# Allegro board PSU-A2-1-DEG.brd
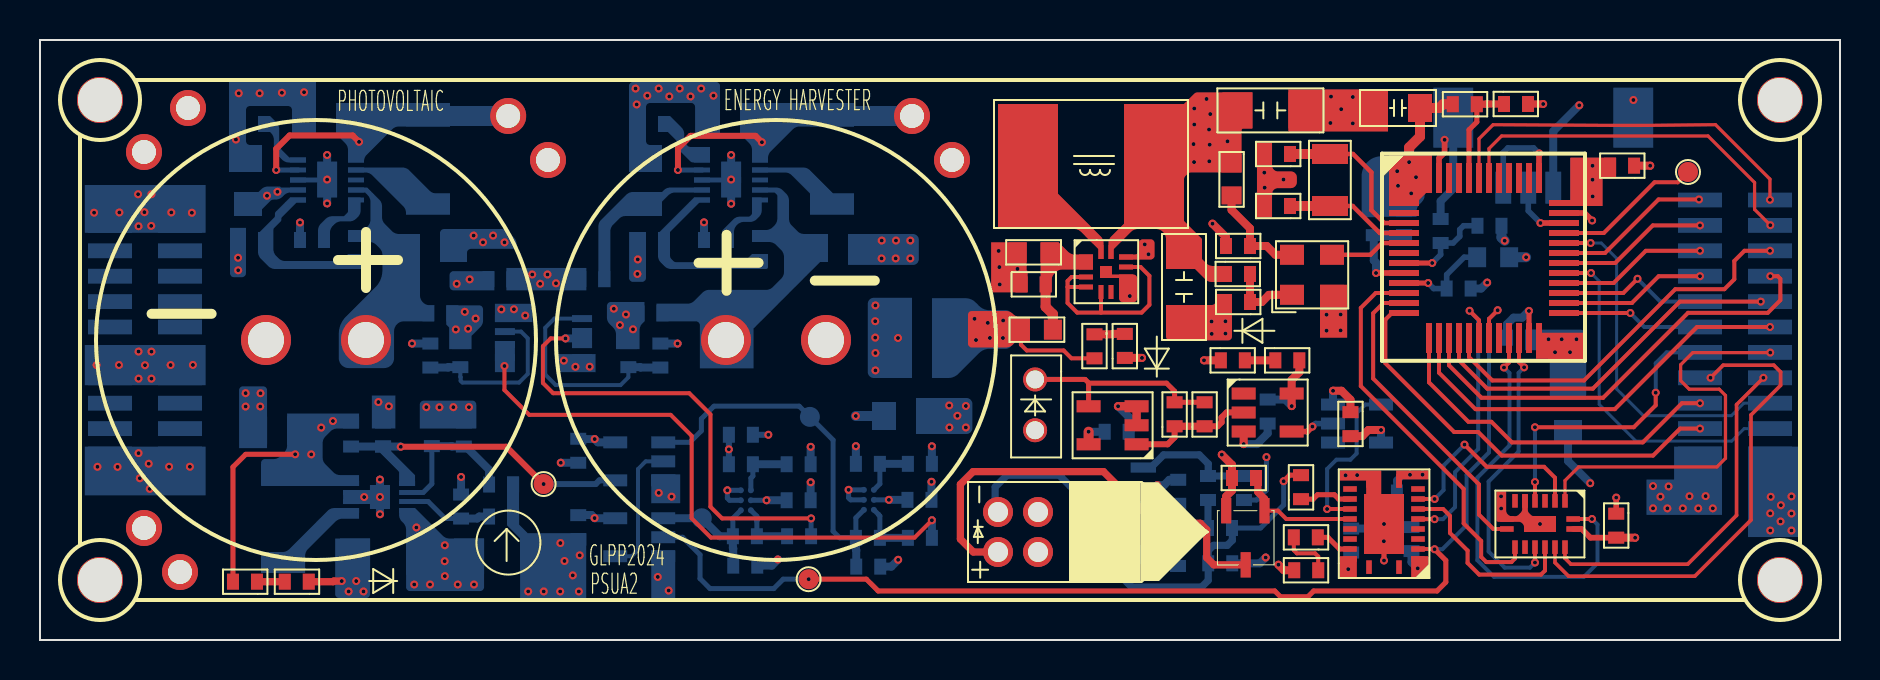
[diagram p0: board, top side]
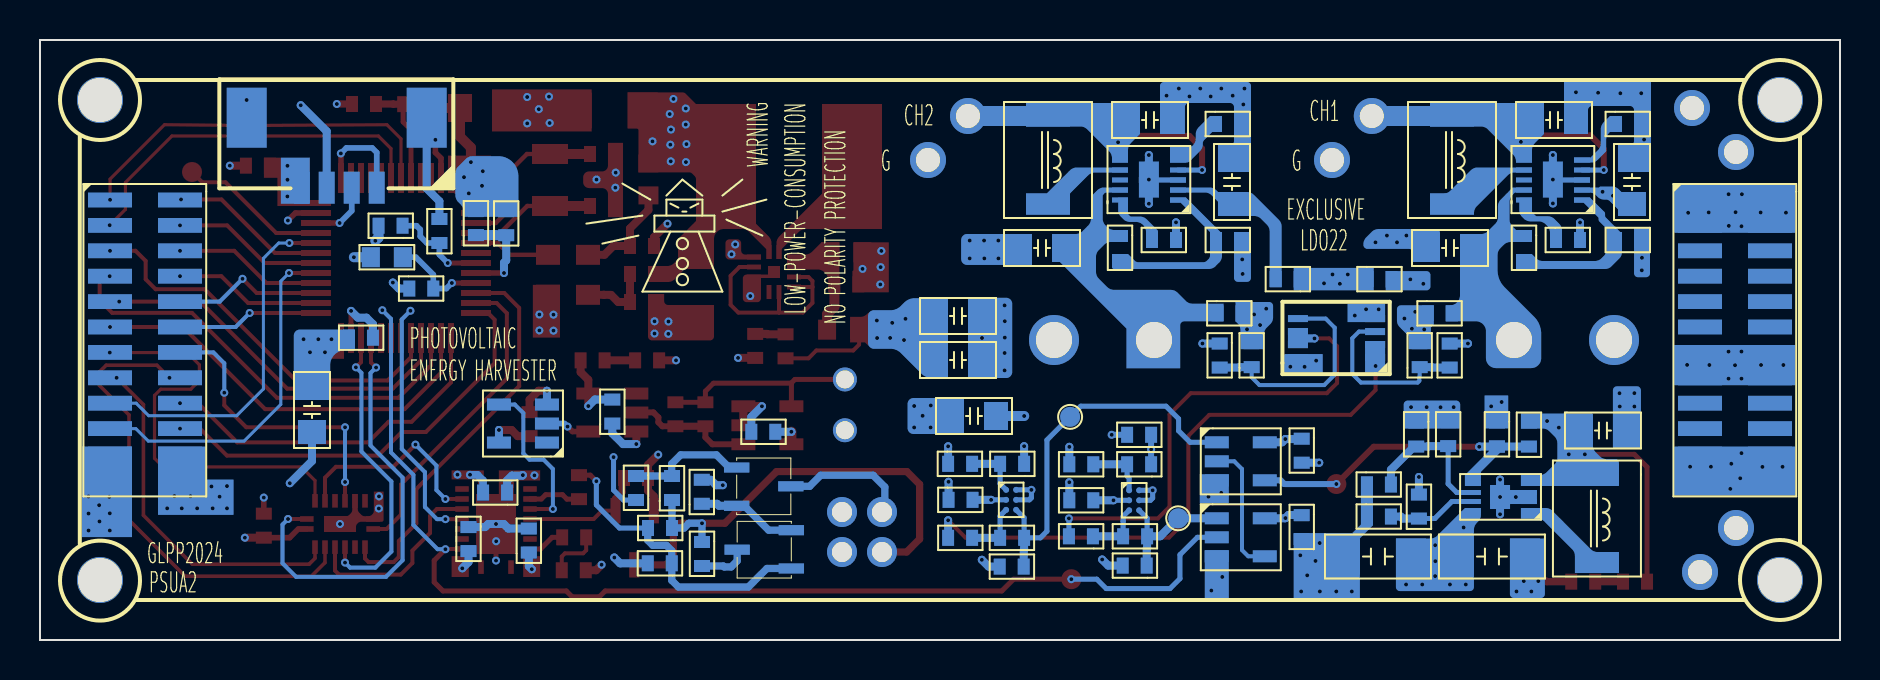
[diagram p1: board, bottom side, seen from below]

Outline 90 x 30 mm; copper layers: TOP, GND, VCC, BOTTOM. Coordinates in mm from the lower left corner of the outline.
Outline path: 0,30 90,30 90,0 0,0 0,30

## Design rules (mm)
constraint set DEFAULT: min track width 0.127
net group N478267: nets N478267 N478271
net group N485107: nets N485107 N485115
net group VCAP1: nets N478345 VCAP1
net group VCAP2: nets N485373 VCAP2
net group BOOST_EN: nets BOOST_EN N478287 N479043 N490401 N490405
net group CHG_FULL: nets CHG_FULL N490413 N490465 N490853 N490915 N491089 N491653 UV_SHDN
net group FIBER_TX_3V3: nets FIBER_TX_3V3 N527048 N527198 N527202 N527222

## Placement (name value [footprint] x y rotation side)
C1  10uF  [C0805]  69 26.6 180 top
C2  33uF  [C1206]  63.17 26.48 180 top
C3  12pF  [C0402]  62.5 24.3 180 top
C4  0.1uF  [C0402]  79.7 23.72 180 top
C5  12pF  [C0402]  62.5 21.7 180 top
C6  0.1uF  [C0402]  60.5 19.7 180 top
C7  10uF  [C0603]  50.48 19.38 180 top
C8  0.1uF  [C0402]  50.28 17.78 180 top
C9  33uF  [C1206]  57.2 16 90 top
C10  4.2V/1F  [SUC_THR_5D0_21D5]  13.8 15 180 top
C11  4.2V/1F  [SUC_THR_5D0_21D5]  36.8 15 0 top
C12  DNI  [C0402]  58.23 10.69 90 top
C13  0.1uF  [C0402]  65.52 11.39 270 top
C14  0.1uF  [C0402]  78.81 6.32 270 top
C15  10uF  [C0805]  35.6 26 180 bottom
C16  10uF  [C0805]  15.4 26 180 bottom
C17  0.1uF  [C0402]  66.69 20.24 90 bottom
C18  10uF  [C0805]  30.4 21.8 90 bottom
C19  10uF  [C0805]  10.4 21.8 90 bottom
C20  0.1uF  [C0402]  68.2 20.25 90 bottom
C21  0.1uF  [C0402]  70.03 19.85 90 bottom
C22  1uF  [C0402]  34.4 20 180 bottom
C23  1uF  [C0402]  14.2 20 180 bottom
C24  10uF  [C0805]  38.8 19.6 0 bottom
C25  10uF  [C0805]  18.4 19.6 0 bottom
C26  0.1uF  [C0402]  71.53 17.57 180 bottom
C27  10uF  [C0805]  45.2 16.2 180 bottom
C28  0.1uF  [C0402]  73.35 15.12 0 bottom
C29  10uF  [C0805]  45.2 14 180 bottom
C30  10uF  [C0805]  76.4 12.6 270 bottom
C31  0.1uF  [C0402]  61.38 10.82 90 bottom
C32  10uF  [C0805]  44.4 11.2 180 bottom
C33  10uF  [C0805]  12.95 10.47 180 bottom
C34  0.1uF  [C0402]  53.23 10.41 0 bottom
C35  33pF  [C0402]  21.19 10.87 270 bottom
C36  0.1uF  [C0402]  34.44 10.26 0 bottom
C37  0.1uF  [C0402]  26.91 10.06 270 bottom
C38  2.2uF  [C0402]  44.59 8.81 180 bottom
C39  2.2uF  [C0402]  38.53 8.79 180 bottom
C40  0.1uF  [C0402]  66.65 7.37 0 bottom
C41  0.1uF  [C0402]  44.57 7.01 180 bottom
C42  0.1uF  [C0402]  38.53 6.99 180 bottom
C43  0.1uF  [C0402]  26.91 6.24 270 bottom
C44  0.1uF  [C0402]  68.58 5.65 270 bottom
C45  0.1uF  [C0402]  65.56 4.37 90 bottom
C46  22uF  [C1206]  21.45 4.17 0 bottom
C47  22uF  [C1206]  19.05 4.17 180 bottom
D1  LED  [LED0402]  54.24 14.11 90 top
D2  GREEN LED  [LED0402]  59.04 13.98 0 top
D3  GREEN LED  [LED0402]  62.71 3.49 0 top
D4  GREEN LED  [LED0402]  13.44 2.91 180 top
J1  SIP-1x4  [SMD-1D25-4P-DEG0]  73.16 22.62 0 bottom
J2  CONN-24P  [SMD_CONN_2X12P_1D27]  83 22 270 bottom
J3  CONN-24P  [SMD_CONN_2X12P_1D27]  3.5 22 270 bottom
L1  33uH/1A  [IND_SMD_7D0X6D6]  55.7 23.8 180 top
L2  2.2uH  [L0603]  59.58 23.83 270 top
L3  2.2uH/500mA  [L0603]  49.05 15.52 0 top
L4  10uH/1A  [IND_SMD_4D4X4D2]  39.6 26.2 270 bottom
L5  10uH/1A  [IND_SMD_4D4X4D2]  19.4 26.2 270 bottom
L6  2.2uH  [L0603]  73.46 19.14 180 bottom
L7  4.7uH/1A  [IND_SMD_4D4X4D2]  12.15 8.27 270 bottom
LD1  LaserDiode  [AXIAL_2D0_4P]  47.9 4.4 90 top
NOREF  -  [unnamed]  3 27 0 top
NOREF#2  -  [unnamed]  3 3 0 top
NOREF#3  -  [#2]  0 0 90 top
NOREF#4  -  [unnamed]  87 3 0 top
NOREF#5  -  [#2]  0 30 0 top
NOREF#6  -  [unnamed]  87 27 0 top
PD1  Photodiode  [PD-THR-2P]  49.76 13.03 270 top
Q1  Si2301BDS-HXY  [SOT23-3]  61.7 6.9 180 top
Q2  2SC1815  [SOT23-3]  55.6 9.1 270 bottom
Q3  2SC1815  [SOT23-3]  52 3.1 90 bottom
R1  DNI  [R0402]  71.84 26.79 180 top
R2  0R  [R0402]  73.2 26.8 0 top
R3  DNP  [R0402]  59.3 18.3 0 top
R4  0R  [R0402]  60.5 16.9 180 top
R5  2K  [R0402]  52.72 15.29 270 top
R6  20K  [R0402]  61.77 13.98 0 top
R7  DNI  [R0402]  56.73 10.69 90 top
R8  10K  [R0402]  59.6 8.1 0 top
R9  5.1K  [R0402]  63.05 7.04 90 top
R10  20K  [R0402]  63.89 5.13 180 top
R11  DNI  [R0402]  10.85 2.91 180 top
R12  200K  [R0402]  31.2 25.8 180 bottom
R13  200K  [R0402]  11.2 25.8 180 bottom
R14  10K  [R0402]  71.87 20.71 0 bottom
R15  1M  [R0402]  31.2 20 180 bottom
R16  1M  [R0402]  11.2 20 180 bottom
R17  2.26M  [R0402]  36 20.2 270 bottom
R18  2.26M  [R0402]  15.8 20.2 270 bottom
R19  0R  [R0402]  27.02 18.04 0 bottom
R20  DNP  [R0402]  23.62 18.04 180 bottom
R21  0R  [R0402]  31.12 16.34 180 bottom
R22  0R  [R0402]  20.61 16.34 180 bottom
R23  1M  [R0402]  31.02 14.82 270 bottom
R24  1M  [R0402]  29.42 13.64 90 bottom
R25  1M  [R0402]  21.02 13.64 90 bottom
R26  1M  [R0402]  19.52 14.82 270 bottom
R27  1M  [R0402]  19.59 9.69 90 bottom
R28  100K  [R0402]  17.15 10.87 270 bottom
R29  DNI  [R0402]  15.55 9.67 90 bottom
R30  3.3K  [R0402]  40.79 8.81 0 bottom
R31  3.3K  [R0402]  34.44 8.79 0 bottom
R32  562K  [R0402]  23.65 7.77 180 bottom
R33  560  [R0402]  60.2 8.2 270 bottom
R34  510  [R0402]  58.4 7 90 bottom
R35  51  [R0402]  56.91 6.81 90 bottom
R36  DNI  [R0402]  21.05 6.07 90 bottom
R37  100K  [R0402]  23.65 6.17 180 bottom
R38  510  [R0402]  58.4 5.6 0 bottom
R39  3.01K  [R0402]  37.35 5.19 0 bottom
R40  4.99K  [R0402]  35.84 5.19 180 bottom
R41  200K  [R0402]  43.39 5.11 0 bottom
R42  998K?  [R0402]  41.99 5.11 180 bottom
R43  51  [R0402]  56.9 4.9 270 bottom
R44  510  [R0402]  58.41 3.84 0 bottom
R45  22.9K?  [R0402]  34.66 3.72 0 bottom
R46  378K?  [R0402]  40.81 3.67 0 bottom
TP1  T POINT R  [TP_THR_1D8_1D2]  7.4 26.6 0 top
TP2  T POINT R  [TP_THR_1D8_1D2]  5.2 24.4 0 top
TP3  T POINT S  [TP_SMD_1D0_NP]  82.4 23.4 0 top
TP4  T POINT S  [TP_SMD_1D0_NP]  25.18 7.8 0 top
TP5  T POINT R  [TP_THR_1D8_1D2]  5.2 5.6 0 top
TP6  T POINT R  [TP_THR_1D8_1D2]  7 3.4 0 top
TP7  T POINT S  [TP_SMD_1D0_NP]  38.43 3.04 0 top
TP8  Solar Cell V+  [TP_THR_1D8_1D2]  23.41 26.2 180 bottom
TP9  Solar Cell V+  [TP_THR_1D8_1D2]  43.6 26.2 180 bottom
TP10  Solar Cell V-  [TP_THR_1D8_1D2]  45.6 24 180 bottom
TP11  Solar Cell V-  [TP_THR_1D8_1D2]  25.4 24 180 bottom
TP12  T POINT S  [TP_SMD_1D0_NP]  38.49 11.16 180 bottom
TP13  T POINT S  [TP_SMD_1D0_NP]  33.09 6.09 180 bottom
U1  STM32L051C8T6  [LQFP-48]  72.2 19.1 270 top
U2  LTC3336EV#TRPBF  [LQFN-12-2D0X2D0MM]  53.3 18.4 0 top
U3  SN74AHC1G14DBVR  [SOT-23-5]  60.18 12.32 0 top
U4  TLV365DBVR  [SOT-23-5]  54.83 9.79 180 top
U5  TXS0108ERGYR  [VQFN-20]  67.2 5.8 90 top
U6  TMUX1309BQBR  [WQFN-16-3D5X2D5MM]  75 5.8 180 top
U7  LTC3105EDD#PBF  [DFN-10]  36 22 90 bottom
U8  LTC3105EDD#PBF  [DFN-10]  15.8 22 90 bottom
U9  ADA4051-2ARMZ  [MSOP-8]  26.86 14.12 90 bottom
U10  SN74AHC1G14DBVR  [SOT-23-5]  64.65 9.87 0 bottom
U11  SN74AUP1G08DBVR  [SOT-23-5]  31.16 9.88 180 bottom
U12  LTC3539EDCB#PBF  [DFN-8]  18.35 6.47 90 bottom
U13  ADCMP380-1ACBZ-RL7  [WLCSP-6]  41.69 7.51 180 bottom
U14  ADCMP380-1ACBZ-RL7  [WLCSP-6]  35.54 7.49 180 bottom
U15  SN74LVC1G32DBVR  [SOT-23-5]  31.16 6.09 180 bottom
Y1  32.768KHz  [SMD3215-2P]  64.5 24.3 270 top
Y2  32.0MHz_X1G0041710040  [SMD2520-4P]  63.6 18.3 0 top

## Library data of the parts
C1 C10 C11 C15 C16 C18 C19 C21 C24-C27 C29 C30 C32 C33 = CAP NP: signal model: DEFAULT_CAPACITOR_1e+07pF_2_1
C2-C9 C12-C14 C17 C20 C28 C31 C34 C37 C40 C43-C45 = CAP NP
C22 C23 = CAP NP: signal model: DEFAULT_CAPACITOR_1e+06pF_2_1
C35 = CAP NP: signal model: DEFAULT_CAPACITOR_33.000000pF_2_1
C36 C41 C42 = CAP NP: signal model: DEFAULT_CAPACITOR_100000pF_2_1
C38 C39 = CAP NP: signal model: DEFAULT_CAPACITOR_2.2e+06pF_2_1
C46 C47 = CAP NP: signal model: DEFAULT_CAPACITOR_2.2e+07pF_2_1
D1-D4 = LED
J1 = SIP-1x4
J2 J3 = CONN-24P
L1-L3 = INDUCTOR
L4 L5 = INDUCTOR: signal model: DEFAULT_INDUCTOR_10000nH_2_1
L6 L7 = INDUCTOR: signal model: DEFAULT_INDUCTOR_4700nH_2_1
LD1 = LaserDiode
PD1 = Photodiode
Q1 = FH3415A
Q2 Q3 = 2SC1815
R1 R2 R14-R16 R23-R27 = R: signal model: DEFAULT_RESISTOR_0.001OHM_2_1
R3-R7 R10 R11 R19-R22 = R
R8 R28 R29 R36 R37 R45 R46 = R: signal model: DEFAULT_RESISTOR_10000OHM_2_1
R9 R33 R34 R38 R44 = R: signal model: DEFAULT_RESISTOR_510.000000OHM_2_1
R12 R13 = R: signal model: DEFAULT_RESISTOR_200000OHM_2_1
R17 R18 = R: signal model: DEFAULT_RESISTOR_0.00226OHM_2_1
R30 R31 = R: signal model: DEFAULT_RESISTOR_3300OHM_2_1
R32 = R: signal model: DEFAULT_RESISTOR_562000OHM_2_1
R35 R43 = R: signal model: DEFAULT_RESISTOR_40.000000OHM_2_1
R39 R41 = R: signal model: DEFAULT_RESISTOR_36000OHM_2_1
R40 R42 = R: signal model: DEFAULT_RESISTOR_147000OHM_2_1
TP1 TP2 TP5 TP6 = T POINT R
TP3 TP4 TP7 TP12 TP13 = T POINT S
TP8-TP11 = T POINT A
U1 = STM32L051C8T6
U2 = LTC3336
U3 U10 = SN74AHC1G14DBVR
U4 = TLV365DBVR
U5 = TXS0108ERGYR
U6 = TMUX1309
U7 U8 = LTC3105EDD#PBF
U9 = ADA4051-2ARMZ
U11 = SN74AUP1G08
U12 = LTC3539EDCB#PBF
U13 U14 = ADCMP380-1ACBZ-RL7
U15 = SN74LVC1G32DBVR
Y1 = CRYSTAL
Y2 = OSCILLATOR

## Footprints (pads in the part's own frame, mm; a bottom-side part is the same pattern mirrored in y, then rotated)
AXIAL_2D0_4P
  round 1.5 hole 1: 1(0,0) 2(2,0) 3(0,-2) 4(2,-2)
C0402
  rect 0.6x0.8 smd: 1(0,0) 2(1.2,0)
C0603
  rect 0.9x1 smd: 1(0,0) 2(1.6,0)
C0805
  rect 1.2x1.4 smd: 1(0,0) 2(2.2,0)
C1206
  rect 1.5x1.8 smd: 1(0,0) 2(3.3,0)
DFN-8
  rect 0.25x0.8 smd: 1(0,-2.8) 2(0.45,-2.8) 3(0.9,-2.8) 4(1.35,-2.8) 5(1.35,0) 6(0.9,0) 7(0.45,0) 8(0,0)
  rect 1.2x1 smd: 9(0.676,-1.355)
DFN-10
  rect 0.25x0.8 smd: 1(0,-2.9) 2(0.5,-2.9) 3(1,-2.9) 4(1.5,-2.9) 5(2,-2.9) 6(2,0) 7(1.5,0) 8(1,0) 9(0.5,0) 10(0,0)
  rect 1.8x1 smd: 11(1.022,-1.444)
IND_SMD_4D4X4D2
  rect 1.05x2.2 smd: 1(0,0) 2(4.4,0)
IND_SMD_7D0X6D6
  rect 3x6 smd: 1(0,0) 2(6.3,0)
L0603
  rect 0.9x1 smd: 1(0,0) 2(1.6,0)
LED0402
  rect 0.6x0.8 smd: 1(0,0) 2(1.2,0)
LQFN-12-2D0X2D0MM
  rect 0.7x0.25 smd: 1(-1,0.75) 2(-1,0.25) 3(-1,-0.25) 4(-1,-0.75) 7(1,-0.75) 8(1,-0.25) 9(1,0.25) 10(1,0.75)
  rect 0.25x0.7 smd: 5(-0.25,-1) 6(0.25,-1) 11(0.25,1) 12(-0.25,1)
  rect 0.6x0.6 smd: 13(0,0)
LQFP-48
  rect 0.3x1.5 smd: 1(-2.75,-4) 2(-2.25,-4) 3(-1.75,-4) 4(-1.25,-4) 5(-0.75,-4) 6(-0.25,-4) 7(0.25,-4) 8(0.75,-4) 9(1.25,-4) 10(1.75,-4) 11(2.25,-4) 12(2.75,-4) 25(2.75,4) 26(2.25,4) 27(1.75,4) 28(1.25,4) 29(0.75,4) 30(0.25,4) 31(-0.25,4) 32(-0.75,4) 33(-1.25,4) 34(-1.75,4) 35(-2.25,4) 36(-2.75,4)
  rect 1.5x0.3 smd: 13(4,-2.75) 14(4,-2.25) 15(4,-1.75) 16(4,-1.25) 17(4,-0.75) 18(4,-0.25) 19(4,0.25) 20(4,0.75) 21(4,1.25) 22(4,1.75) 23(4,2.25) 24(4,2.75) 37(-4,2.75) 38(-4,2.25) 39(-4,1.75) 40(-4,1.25) 41(-4,0.75) 42(-4,0.25) 43(-4,-0.25) 44(-4,-0.75) 45(-4,-1.25) 46(-4,-1.75) 47(-4,-2.25) 48(-4,-2.75)
MSOP-8
  rect 0.35x1 smd: 1(-0.001,-3.615) 2(0.649,-3.615) 3(1.299,-3.615) 4(1.949,-3.615) 5(1.949,0.241) 6(1.299,0.241) 7(0.649,0.241) 8(-0.001,0.241)
PD-THR-2P
  round 1.2 hole 0.9: 1(0,0) 2(2.54,0)
R0402
  rect 0.6x0.8 smd: 1(0,0) 2(1.2,0)
SMD2520-4P
  rect 1.2x1 smd: 1(-1,-1.04) 2(1,-1.04) 3(1,0.96) 4(-1,0.96)
SMD3215-2P
  rect 1x1.8 smd: 1(0,0) 2(2.6,0)
SMD-1D25-4P-DEG0
  rect 0.8x1.6 smd: 1(0,0) 2(1.25,0) 3(2.5,0) 4(3.75,0)
  rect 2x3 smd: 5(6.5,-3.5) 6(-2.5,-3.5)
SMD_CONN_2X12P_1D27
  rect 0.74x2.2 smd: 1(0,-3.5) 2(1.27,-3.5) 3(2.54,-3.5) 4(3.81,-3.5) 5(5.08,-3.5) 6(6.35,-3.5) 7(7.62,-3.5) 8(8.89,-3.5) 9(10.16,-3.5) 10(11.43,-3.5) 11(12.7,-3.5) 12(13.97,-3.5) 13(13.97,0) 14(12.7,0) 15(11.43,0) 16(10.16,0) 17(8.89,0) 18(7.62,0) 19(6.35,0) 20(5.08,0) 21(3.81,0) 22(2.54,0) 23(1.27,0) 24(0,0)
SOT23-3
  rect 0.51x1.27 smd: 1(0.476,0.434) 2(2.391,0.434) 3(1.415,3.142)
SOT-23-5
  rect 1.2x0.6 smd: 1(0,0) 2(0,-0.95) 3(0,-1.9) 4(2.4,-1.9) 5(2.4,0)
SUC_THR_5D0_21D5
  round 2.5 hole 1.8: 1(-2.5,0) 2(2.5,0)
TP_SMD_1D0_NP
  round 1 smd: 1(0,0)
TP_THR_1D8_1D2
  round 1.8 hole 1.2: 1(0,0)
unnamed
  round 2.3 hole 2.2 unplated: (0,0)
VQFN-20
  rect 0.68x0.28 smd: 1(-2.157,-0.75) 10(2.158,-0.75) 11(2.158,0.75) 20(-2.157,0.75)
  rect 0.28x0.68 smd: 2(-1.75,-1.7) 3(-1.25,-1.7) 4(-0.75,-1.7) 5(-0.25,-1.7) 6(0.25,-1.7) 7(0.75,-1.7) 8(1.25,-1.7) 9(1.75,-1.7) 12(1.75,1.7) 13(1.25,1.7) 14(0.75,1.7) 15(0.25,1.7) 16(-0.25,1.7) 17(-0.75,1.7) 18(-1.25,1.7) 19(-1.75,1.7)
  rect 3x2 smd: EPAD(0,0)
WLCSP-6
  round 0.3 smd: A1(0,0) A2(0.5,0) B1(0,-0.5) B2(0.5,-0.5) C1(0,-1) C2(0.5,-1)
WQFN-16-3D5X2D5MM
  rect 0.68x0.28 smd: 1(-1.658,-0.25) 8(1.657,-0.25) 9(1.657,0.25) 16(-1.658,0.25)
  rect 0.28x0.68 smd: 2(-1.25,-1.158) 3(-0.75,-1.158) 4(-0.25,-1.158) 5(0.25,-1.158) 6(0.75,-1.158) 7(1.25,-1.158) 10(1.25,1.157) 11(0.75,1.157) 12(0.25,1.157) 13(-0.25,1.157) 14(-0.75,1.157) 15(-1.25,1.157)
  rect 1.6x0.8 smd: EPAD(0,0)

## Nets
GND: C1.2 C2.1 C3.2 C4.1 C5.2 C6.2 C7.2 C8.2 C9.1 C10.2 C11.2 C13.1 C14.1 C15.2 C16.2 C17.1 C18.2 C19.2 C20.1 C21.2 C22.2 C23.2 C24.2 C25.2 C26.1 C27.2 C28.1 C29.2 C30.2 C31.1 C32.1 C33.2 C34.2 C36.2 C37.2 C38.1 C39.1 C40.1 C41.1 C42.1 C43.2 C44.1 C45.2 C46.2 C47.2 D1.1(CATHODE) D2.1(CATHODE) D3.1(CATHODE) D4.1(CATHODE) J1.3 J1.5 J1.6 J2.11 J2.12 J3.7 J3.8 J3.17 J3.18 PD1.2 R2.2 R4.2 R12.2 R13.2 R15.2 R16.2 R23.1 R26.1 R28.1 R32.1 R33.2 R35.2 R37.1 R44.2 TP1.1(TP) TP6.1(TP) TP10.1(TP) TP11.1(TP) U1.8(VSSA) U1.23 U1.35 U1.47 U2.7 U2.8 U2.10 U2.13 U3.3 U4.2 U4.3 U5.11 U5.EPAD U6.6 U6.8 U6.EPAD U7.3 U7.11 U8.3 U8.11 U9.4(V-) U10.3 U11.3 U12.2 U12.3 U12.9 U13.A2 U13.B2 U14.A2 U14.B2 U15.3 Y2.2
P1V8: C1.1 C2.2 C4.2 C9.2 C14.2 C17.2 C20.2 C28.2 C30.1 C40.2 C44.2 J1.4 L1.1 L2.1 L6.1 R1.2 R3.1 R14.2 U1.1 U1.24 U1.36 U1.48 U2.11(VOUT) U5.2 U5.10 U6.16(VDD)
P3V3: C13.2 C27.1 C29.1 C31.2 C34.1 C35.1 C45.1 C46.1 C47.1 J2.13 J2.14 J3.1 J3.2 J3.11 J3.12 J3.13 J3.14 J3.23 J3.24 L3.1 Q1.2(S) R5.2 R6.2 R8.1 R27.2 TP2.1(TP) TP5.1(TP) U3.5 U4.5 U5.19(VCCB) U10.5 U12.8(VOUT)
ALL_SHUTDOWN: J3.22
BOOST_EN: R28.2 R29.1 TP4.1(TP) U11.4(Y) U12.5
CHG_FULL: R40.2 R45.1 TP13.1(TP) U14.C2 U15.1
FIBER_RX: U5.7 U6.13
FIBER_RX_3V3: U5.14 U10.4(Y)
FIBER_TX: U5.8 U6.3
FIBER_TX_3V3: R9.1 U5.13
I2C1_SCL: J2.2 U1.42
I2C1_SDA: J2.1 U1.43
IAM_ALIVE: TP7.1(TP) U1.19 U5.3 U15.2
IR_UART_RX: J2.17 U6.14
IR_UART_TX: J2.18 U6.5
LDO22: C32.2 C36.1 C37.1 C41.2 C42.2 C43.1 R19.1 R20.1 R30.1 R31.1 R45.2 R46.2 U9.8 U11.5 U13.B1 U14.B1 U15.5
LDO22-1: C19.1 R20.2 U8.2
LDO22-2: C18.1 R19.2 U7.2
LPUART1_RX: U1.22 U6.12
LPUART1_TX: U1.21 U6.1
OV_UART_RX: J2.8 U6.15
OV_UART_TX: J2.7 U6.2
PA8: J2.10 U1.29
PA11: J2.9 U1.32
RESERVED1: U1.41
RESERVED2: U1.40
ROUTE_A0: U1.10 U6.10
ROUTE_A1: U1.11 U6.9
SPI1_MISO: J2.5 U1.16
SPI1_MOSI: J2.3 U1.17
SPI1_NSS: J2.6 U1.14
SPI1_SCK: J2.4 U1.15
SPI2_MISO: J2.20 U1.27
SPI2_MOSI: J2.22 U1.28
SPI2_NSS: J2.19 U1.25
SPI2_SCK: J2.21 U1.26
SYS_SWCLK: J1.1 U1.37
SYS_SWDIO: J1.2 U1.34
TX_EN: U1.18 U5.6
TX_PWR_EN: Q1.1 R8.2 U5.15
UN-USED-1: J3.3
UN-USED-2: J3.4
UN-USED-3: J3.5
UN-USED-4: J3.6
UN-USED-5: J3.9
UN-USED-6: J3.10
UN-USED-7: J3.15
UN-USED-8: J3.16
UN-USED-9: J3.19
UN-USED-10: J3.20
UN-USED-11: J3.21
USART1_RX: J2.24 U1.31
USART1_TX: J2.23 U1.30
USART2_RX: J2.16 U1.13
USART2_TX: J2.15 U1.12
UV_SHDN: R42.2 R46.1 TP12.1(TP) U11.1 U13.C2
VCAP: C33.1 L7.1 R11.2 R21.2 R22.1 R24.2 R25.2 R29.2 R36.2 U12.4
VCAP1: C10.1 C25.1 R18.1 R22.2 U8.9(VOUT)
VCAP2: C11.1 C24.1 R17.1 R21.1 U7.9(VOUT)
N478267: C16.1 L5.1 TP8.1(TP) U8.4 U8.6
N478271: L5.2 U8.7
N478287: L7.2 U12.1
N478345: R16.1 R18.2 U8.1
N478365: C35.2 R27.1 R32.2 U12.6
N478369: R13.1 U8.5
N478385: C23.1 U8.10
N479043: R36.1 R37.2 U12.7
N485107: C15.1 L4.1 TP9.1(TP) U7.4 U7.6
N485115: L4.2 U7.7
N485373: R15.1 R17.2 U7.1
N485445: R12.1 U7.5
N485483: C22.1 U7.10
N490401: R23.2 R24.1 U9.5
N490405: R25.1 R26.2 U9.3
N490413: C38.2 R30.2 U13.A1(VCC)
N490465: R41.2 U9.1 U9.2
N490853: R41.1 R42.1 U13.C1
N490915: R39.2 U9.6 U9.7
N490953: U11.2 U15.4(Y)
N491089: C39.2 R31.2 U14.A1(VCC)
N491611: C7.1 C8.1 L3.2 U2.1 U2.2
N491653: R39.1 R40.1 U14.C1
N492211: L1.2 U2.12
N492453: U2.3 U2.4 U2.5 U2.9
N504730: C3.1 U1.3 Y1.1
N504882: C5.1 U1.4 Y1.2
N512213: U1.5 Y2.3
N512221: R3.2 R4.1 Y2.1
N512229: C6.1 L2.2 Y2.4(VDD)
N517140: C26.2 L6.2 U1.9
N518111: C21.1 R14.1 U1.7
N527048: LD1.1 Q1.3 R34.1 R38.1 R43.1
N527184: LD1.2 Q2.3
N527198: Q3.1 R9.2 R38.2 R44.1
N527202: Q3.3 R43.2
N527222: Q2.1 R33.1 R34.2
N527434: Q2.2(E) Q3.2(E) R35.1
N541574: D3.2 R10.2
N546758: C12.2 PD1.1 R7.2 U4.4
N546765: C12.1 R7.1 U3.2 U4.1(VOUT)
N549679: U3.4(Y) U10.2
N554827: D2.2 R6.1
N555295: D4.2 R11.1
N563900: R10.1 U5.18
N602776: R1.1 R2.1 U1.44
N742936: D1.2 R5.1
N756514: TP3.1(TP) U1.33

Pads without a net: LD1 3 4; U1 2 6 20 38 39 45 46; U2 6; U3 1; U5 1 4 5 9 12 16 17 20; U6 4 7 11; U7 8; U8 8; U10 1

## Via types
v1: diameter 0.4, hole 0.2, TOP to BOTTOM, 318 vias

## Routing (per net, layer and track width the routed paths; a pad name or vN(x,y) marks a point on that pad's centre or on a via; arc(x,y) is an arc through that point)
GND: length 73.6
  TOP w0.127: 67.2,4.95 v1(67.19,4.94)
  TOP w0.25: v1(67.2,3.97) v1(67.2,5.8) ; U1.23 74.45,16.45 v1(74.45,16.45)
  TOP w0.28: U1.47 69.95,24.09 70.23,24.37 v1(70.23,25.01) ; v1(77.61,20.98) 77.23,21.35 U1.35 ; U1.8 v1(66.8,18.35) ; C14.1 v1(78.81,7.12)
  TOP w0.36: v1(15.09,2.95) 14.69,2.95 14.66,2.91 D4.1 ; R2.2 v1(75.16,26.8)
  TOP w0.4: D1.1 v1(55.1,14.11) ; v1(61.92,3.76) 62.2,3.49 D3.1 ; D2.1 v1(58.2,13.98) ; C4.1 v1(80.51,23.72) ; C6.2 59.3,20.14 v1(58.62,20.81) ; v1(64.65,12.46) 65.08,12.46 65.52,12.02 C13.1 ; U3.3 v1(60.18,9.8)
  TOP w0.42: v1(53.9,11.69) U4.3 U4.2
  BOTTOM w0.25: R33.2 60.83,7 61.32,7.5 v1(61.32,9.14) ; U13.A2 v1(40.43,7.51) 40.43,7.12 40.45,7.09 40.45,7.09 40.53,7.01 U13.B2 ; U14.A2 v1(34.37,7.49) 34.37,7.1 34.48,6.99 U14.B2
  BOTTOM w0.3: C36.2 v1(36.42,10.26)
  BOTTOM w0.4: v1(14.36,21.83) v1(14.36,23.02) v1(14.36,24.25) ; v1(34.56,24.25) v1(34.56,23.02) v1(34.56,21.81) ; v1(74.45,16.45) 74.11,16.12 73.68,16.12 73.35,15.79 C28.1 ; v1(76.96,26.74) 75.66,25.44 J1.3 ; v1(66.8,18.35) 66.8,18.87 66.69,18.98 C17.1 ; C40.1 66.65,7.98 66.4,8.22 65.88,8.22 v1(65.86,8.24) ; C22.2 v1(33.2,20.88) ; R44.2 61,3.84 v1(61.28,4.12) ; v1(55.86,7.74) 56.2,7.74 56.47,8.01 R35.2 ; C31.1 61.38,10.33 60.85,9.8 v1(60.18,9.8) ; U10.3 v1(64.65,12.46) ; J1.6 70.66,22.57 70.03,21.94 C21.2 ; C38.1 v1(44.59,9.68) ; C30.2 76.4,8.95 v1(77.51,7.84) ; C42.1 v1(38.53,7.89) ; v1(17,8.02) v1(17,7.15) v1(17,6.29) ; R23.1 v1(31.88,14.82) ; C26.1 72.06,17.57 v1(72.36,17.87) ; C23.2 v1(13,20.88) ; C41.1 v1(44.57,7.91) ; C34.2 54.44,11.15 v1(53.9,11.69) ; C39.1 v1(38.53,9.66) ; R26.1 v1(18.6,14.82) ; C45.2 66.58,5.57 66.81,5.8 v1(67.2,5.8) 67.59,5.8 67.74,5.65 C44.1 ; C37.2 v1(26.04,8.86)
  BOTTOM w0.5: C17.1 67.28,20.24 67.29,20.25 C20.1
  vias: v1(2.83,13.75) v1(3.95,13.75) v1(4.93,14.42) v1(4.93,13.07) v1(5.25,13.74) v1(5.57,14.42) v1(5.57,13.07) v1(6.53,13.75) v1(7.64,13.75) v1(9.8,25.02) v1(9.94,27.34) v1(9.9,19.11) v1(9.91,18.48) v1(10.28,12.34) v1(10.28,11.67) v1(10.98,27.34) v1(11.03,12.34) v1(11.01,11.67) v1(12.1,27.36) v1(13.2,27.39) v1(15.43,2.43) v1(15.81,2.95) v1(16.21,7.15) v1(16.18,2.43) v1(16.92,11.9) v1(17.44,11.68) v1(21.68,20.22) v1(22.15,19.88) v1(22.65,20.22) v1(23.07,16.53) v1(23.23,19.88) v1(23.7,16.54) v1(24.26,16.22) v1(24.41,2.43) v1(25.19,2.43) v1(26.02,4.85) v1(26.01,2.43) v1(26.23,3.95) v1(26.64,3.23) v1(26.94,2.43) v1(26.99,4.23) v1(29.78,27.57) v1(29.84,26.78) v1(29.89,19.03) v1(29.87,18.3) v1(30.36,27.22) v1(30.93,27.57) v1(30.94,7.36) v1(30.89,3.15) v1(31.43,2.47) v1(31.46,27.18) v1(31.58,7.17) v1(31.99,27.57) v1(32.53,27.18) v1(33.06,27.57) v1(33.67,27.22) v1(41.77,16.73) v1(41.76,15.94) v1(41.76,15.12) v1(41.77,14.35) v1(41.77,13.48) v1(42.09,19.97) v1(42.08,19.08) v1(42.8,19.97) v1(42.78,19.08) v1(42.9,15.1) v1(43.52,19.97) v1(43.52,19.08) v1(45.46,11.73) v1(45.47,10.63) v1(45.87,11.21) v1(46.29,11.7) v1(46.29,10.63) v1(47.93,19.45) v1(47.97,18.64) v1(47.99,17.78) v1(48.87,18.56) v1(54.49,17.2) v1(55.24,19.78) v1(55.43,19.29) v1(58.58,15.92) v1(58.58,15.31) v1(59.27,15.94) v1(59.27,15.32) v1(61.21,23.37) v1(61.23,22.62) v1(62.17,23.02) v1(64.33,16.27) v1(64.33,15.47) v1(64.55,27.17) v1(64.52,25.85) v1(65.03,16.27) v1(65.03,15.48) v1(65.06,26.54) v1(65.28,8.23) v1(65.64,27.15) v1(65.64,25.83) v1(73.05,7.18) v1(73.06,6.57) v1(75,5.8) v1(79.67,27) v1(86.54,7.16) v1(86.51,6.33) v1(86.51,5.47) v1(87.04,6.74) v1(87.03,5.93) v1(87.57,7.18) v1(87.57,6.32) v1(87.57,5.47)
P1V8: length 32.7
  TOP w0.127: C9.2 57.35,19.3
  TOP w0.28: U6.16 77.08,5.55 77.52,5.11 C14.2
  TOP w0.4: C14.2 v1(79.76,5.11)
  TOP w0.5: v1(68.45,23.89) 68.45,24.62 69,25.17 C1.1 69.96,26.6 70.15,26.79 R1.2
  VCC w0.127: v1(58.52,26.3) 57.99,25.77 v1(57.71,25.77) 57.71,26.16 v1(57.71,26.58) ; v1(58.52,26.3) 58.79,26.02 58.79,25.86 v1(58.45,25.52) ; v1(58.52,26.3) 58.33,26.48 v1(58.33,27.05) ; v1(58.46,23.93) 58.46,24.35 58.48,24.37 v1(58.48,24.76) ; v1(57.7,23.89) 57.7,24.38 57.68,24.4 v1(57.68,24.8) 57.98,24.49 58.21,24.49 v1(58.48,24.76) ; v1(58.45,25.52) 58.76,25.21 59.1,25.21 v1(59.38,24.93) ; v1(58.45,25.52) 58.18,25.25 58.18,25.07 v1(58.48,24.76) ; v1(76.5,14.39) 76.82,14.71 v1(76.82,15.04) v1(76.08,15.04) v1(75.43,15.04) 75.43,14.71 v1(75.75,14.39) ; v1(68.8,23.14) 68.8,23.55 v1(68.45,23.89) 68,23.44 v1(67.86,23.44) 68.18,23.12 68.18,22.99 v1(67.9,22.71) 68.28,22.33 v1(68.56,22.33) ; v1(77.63,22.18) 77.63,22.62 77.63,22.62 v1(77.63,23.01) v1(77.63,23.71) ; v1(69.13,8.27) 69.12,8.26 v1(68.5,8.26)
  BOTTOM w0.38: v1(68.56,22.33) 68.28,22.05 68.28,22.02 68.2,21.94 C20.2 ; C40.2 67.85,7.98 68.13,8.26 v1(68.5,8.26) ; v1(67.9,22.71) 67.07,22.71 66.69,22.33 C17.2
  BOTTOM w0.4: v1(68.89,3.58) 68.58,3.89 C44.2
  BOTTOM w0.5: L6.1 v1(74.31,19.14) ; v1(73.23,19.96) 73.07,20.12 73.07,20.71
P3V3: length 55
  TOP w0.2: L3.1 49.05,14.77 49.34,14.48 51.18,14.48 51.57,14.09 R5.2
  TOP w0.4: 59.31,6.47 59.31,7.18 59.6,7.47 R8.1 59.6,8.76 v1(59.09,9.27) ; C13.2 66.11,10.19 66.42,10.5 v1(67.05,10.5) ; v1(62.58,11.7) U3.5 62.58,13.01 62.97,13.39 R6.2
  TOP w0.5: U4.5 v1(52.43,10.41)
  VCC w0.127: v1(48.15,15.1) 51.13,15.1 52.43,13.8 v1(52.43,10.41) 57.95,10.41 ; v1(48.15,15.1) 48.15,15.49 48.16,15.5 v1(48.16,15.97) 48.04,15.86 v1(47.39,15.86) 47.19,16.06 v1(46.73,16.06) ; v1(48.15,15.1) 48.14,15.1 v1(47.49,15.1) 47.39,15 v1(46.8,15) ; 57.95,10.41 59.23,11.7 v1(62.58,11.7) ; 57.95,10.41 v1(59.09,9.27) 59.96,8.4 59.96,7.1 63.52,3.54 v1(65.41,3.54) ; v1(20.23,3.94) 20.23,4.33 20.24,4.34 v1(20.24,4.74) 19.35,5.63 v1(18.82,5.63) ; v1(19.32,11.64) 19.97,11.64 v1(19.97,11.64) 20.25,11.92 20.39,11.92 v1(20.67,11.64) v1(21.45,11.64)
  BOTTOM w0.4: v1(62.58,11.7) 62.26,12.02 C31.2 ; v1(52.43,10.41) 52.43,10.41 C34.1 ; v1(65.41,3.54) 65.56,3.69 C45.1 ; U10.5 v1(67.05,10.5)
  vias: v1(2.7,21.37) v1(2.87,8.66) v1(3.88,8.66) v1(3.97,21.38) v1(4.9,22.29) v1(4.93,20.69) v1(4.93,9.34) v1(4.99,8.09) v1(5.22,21.39) v1(5.43,8.81) v1(5.49,7.56) v1(5.57,22.29) v1(5.56,20.71) v1(6.46,8.66) v1(6.57,21.38) v1(7.5,8.66) v1(7.59,21.36) v1(18.71,2.77) v1(19.5,2.77) v1(20.24,3.2) v1(20.89,2.77) v1(21.7,2.77) v1(80.65,7.7) v1(80.65,6.58) v1(81.02,7.16) v1(81.43,7.68) v1(81.37,6.58) v1(82.14,6.58) v1(82.47,7.19) v1(82.91,6.58) v1(83.28,7.19) v1(83.64,6.58)
BOOST_EN: length 14.1
  TOP w0.3: v1(25.18,7.8) 23.32,9.66 v1(18.04,9.66)
  BOTTOM w0.3: v1(25.18,7.8) 27.78,7.8 27.97,7.98 28.76,7.98
  BOTTOM w0.4: R29.1 R28.2 18.03,9.67 v1(18.04,9.66)
CHG_FULL: length 6.8
  BOTTOM w0.25: U14.C2 34.64,6.09 R40.2
  BOTTOM w0.4: U15.1 TP13.1 33.99,5.19 R40.2 34.64,4.6 34.66,4.58 R45.1
FIBER_RX: length 9.8
  TOP w0.2: U5.7 70.16,6.55 70.5,6.21 70.5,5.35 71.38,4.47 71.38,3.85 71.96,3.27 75.05,3.27 75.25,3.47 U6.13
FIBER_RX_3V3: length 8.4
  TOP w0.2: U5.14 v1(64.36,6.55)
  BOTTOM w0.2: v1(64.36,6.55) 64.36,8.55 64.82,9.02 65.52,9.02 65.83,9.33 65.83,11.35 66.26,11.77 U10.4
FIBER_TX: length 10.5
  TOP w0.2: v1(71.23,9.77) 72.34,8.66 75.2,8.66 75.75,8.11 U6.3 ; v1(69.73,7.05) U5.8
  BOTTOM w0.2: v1(71.23,9.77) 70.18,8.72 70.18,7.5 v1(69.73,7.05)
FIBER_TX_3V3: length 2.6
  TOP w0.25: U5.13 64.93,7.05 64.72,7.26 63.88,7.26 63.65,7.04 R9.1
I2C1_SCL: length 18.4
  TOP w0.16: v1(86.52,20.74) 85.73,21.53 85.73,22.87 83.4,25.2 73.08,25.2 72.45,24.57 U1.42
I2C1_SDA: length 19
  TOP w0.16: U1.43 71.95,25.06 72.65,25.76 79.47,25.73 79.86,25.73 83.77,25.77 86.5,23.04 v1(86.5,22.01)
IAM_ALIVE: length 59.5
  TOP w0.2: U1.19 72.45,16.06 v1(72.88,16.49) ; U5.3 69.72,4.55 v1(69.73,4.54)
  TOP w0.25: v1(69.73,4.54) 70.29,3.98 70.29,2.89 69.85,2.45 63.68,2.45 63.39,2.16 62.03,2.16 61.74,2.45 41.91,2.45 41.32,3.04 v1(38.43,3.04)
  BOTTOM w0.2: v1(72.88,16.49) 72.45,16.06 72.45,9.38 71.33,8.26 71.33,5.75 70.12,4.54 v1(69.73,4.54)
  BOTTOM w0.25: v1(38.43,3.04) 37.16,3.04 36.69,2.57 33.5,2.57 33,3.07 33,4.26 32.13,5.14 U15.2
IR_UART_RX: length 23.9
  TOP w0.18: v1(83.53,13.11) 84.16,13.74 86.69,13.74 87.03,13.4 87.03,12.73 85.55,11.25 85.55,6 82.74,3.19 76.43,3.19 75.75,3.87 U6.14
IR_UART_TX: length 14.7
  TOP w0.2: v1(80.79,12.36) 80.79,11.73 79.69,10.64 v1(74.75,10.64) ; v1(74.75,7.9) 74.75,7.81 74.75,7.81 U6.5
  BOTTOM w0.2: J2.18 81.33,14.38 80.79,13.84 v1(80.79,12.36) ; v1(74.75,7.9) 74.75,8.29 74.75,8.29 74.75,10.25 74.75,10.25 v1(74.75,10.64)
LDO22: length 51.2
  VCC w0.127: 36.33,5.4 36.33,4.59 v1(36.89,4.02) ; 36.33,5.4 v1(36.33,6.99) 36.33,8.31 35.15,9.49 34.88,9.49 34.83,9.53 v1(34.44,9.53) 33.59,9.53 ; 36.33,5.4 36.75,4.98 40.85,4.98 ; v1(40.79,9.69) 40.79,10.81 40.79,10.81 v1(40.79,11.2) 39.7,12.29 36.35,12.29 33.59,9.53 ; v1(42.91,4.01) 41.82,4.01 40.85,4.98 ; 40.85,4.98 42.45,6.57 v1(42.45,7.01) ; v1(27.73,6.1) 27.73,9.65 27.73,9.66 v1(27.73,10.05) 28.25,9.53 33.59,9.53
  BOTTOM w0.25: U14.B1 v1(36.33,6.99) ; v1(42.45,7.01) U13.B1
  BOTTOM w0.3: R31.1 v1(34.44,9.53) C36.1
  BOTTOM w0.4: v1(36.33,6.99) C42.2 ; R45.2 36.59,3.72 v1(36.89,4.02) ; C41.2 v1(42.45,7.01) ; R46.2 42.57,3.67 v1(42.91,4.01) ; C43.1 26.92,6.25 27.58,6.25 v1(27.73,6.1) 27.74,6.09 28.76,6.09 ; R30.1 v1(40.79,9.69) ; 28.76,9.88 27.89,9.88 v1(27.73,10.05) 26.93,10.05 C37.1
  BOTTOM w0.5: C32.2 v1(40.79,11.2)
  vias: v1(24.61,18.28) v1(25.01,17.81) v1(25.38,18.28) v1(25.8,17.83) v1(26.19,13.97) v1(26.77,13.66) v1(27.48,13.66)
LDO22-1:
  vias: v1(11.35,22.21) v1(11.87,22.41) v1(20.83,17.81) v1(21.48,18.03)
LPUART1_RX: length 15
  TOP w0.2: U6.12 74.75,4.64 v1(74.75,3.87) ; U1.22 73.95,13.89 v1(74.21,13.63)
  BOTTOM w0.2: v1(74.21,13.63) 73.93,13.36 73.93,9.42 72.43,7.93 72.43,4.42 73.23,3.62 74.5,3.62 v1(74.75,3.87)
LPUART1_TX: length 21.9
  TOP w0.2: v1(77.6,6.05) U6.1 ; U1.21 73.45,13.88 v1(73.2,13.62)
  BOTTOM w0.2: v1(73.2,13.62) 73.47,13.35 73.47,9.72 71.87,8.12 71.87,3.99 72.7,3.16 77.19,3.16 77.88,3.84 77.88,5.77 v1(77.6,6.05)
OV_UART_RX: length 17.7
  TOP w0.18: v1(86.17,13.11) 84.83,11.77 84.83,6.23 82.38,3.79 76.55,3.79 76.25,4.09 U6.15
OV_UART_TX: length 20.7
  TOP w0.16: v1(86.51,14.37) 82.64,14.37 82.03,13.76 82.03,12.97 82.46,12.54 83.96,12.54 84.27,12.23 84.27,9.09 83.84,8.65 76.93,8.65 76.25,7.97 U6.2
PA8: length 17.6
  TOP w0.2: U1.29 v1(77.55,18.35)
  BOTTOM w0.15: v1(77.55,18.35) 77.96,17.94 77.96,11.78 79.8,9.95 84.58,9.95 85.21,10.57 J2.10
PA11: length 18
  TOP w0.2: U1.32 v1(77.53,19.85)
  BOTTOM w0.15: J2.9 85.19,11.84 84.57,11.21 80.17,11.21 78.83,12.55 78.83,19.08 78.06,19.85 v1(77.53,19.85)
ROUTE_A0: length 19.9
  TOP w0.2: U6.10 73.75,4.08 73.57,3.9 72.31,3.9 72.06,4.15 72.06,4.95 71.18,5.83 71.18,7.55 66.04,12.69 66.04,16.6 66.79,17.35 U1.10
ROUTE_A1: length 15.7
  TOP w0.2: U6.9 72.67,5.55 71.95,6.27 71.95,7.78 66.66,13.07 66.66,16.34 67.17,16.85 U1.11
SPI1_MISO: length 18.6
  TOP w0.2: U1.16 70.95,13.98 72.36,12.57 77.64,12.57 81.99,16.92 v1(86.04,16.92)
SPI1_MOSI: length 19.7
  TOP w0.2: U1.17 71.45,14.14 72.62,12.98 77.2,12.98 81.77,17.54 84.22,17.54 84.72,18.04 84.72,18.95 85.22,19.46 v1(86.5,19.46)
SPI1_NSS: length 20.7
  TOP w0.2: U1.14 69.95,13.36 71.77,11.54 78.74,11.54 82.85,15.65 v1(86.5,15.65)
SPI1_SCK: length 22.3
  TOP w0.2: v1(86.52,18.19) 86.89,18.19 87.02,18.06 87.02,16.99 86.39,16.36 82.4,16.36 78.16,12.11 72.07,12.11 70.45,13.73 U1.15
SPI2_MISO: length 7.6
  TOP w0.2: U1.27 79.17,17.35 v1(79.88,18.06)
  BOTTOM w0.2: J2.20 81.02,16.92 v1(79.88,18.06)
SPI2_MOSI: length 7.5
  TOP w0.2: v1(83,19.46) 80.29,19.46 78.68,17.85 U1.28
SPI2_NSS: length 7.1
  TOP w0.2: v1(79.52,16.35) U1.25
  BOTTOM w0.2: v1(79.52,16.35) 80.22,15.65 J2.19
SPI2_SCK: length 7.4
  TOP w0.2: U1.26 79.59,16.85 80.93,18.19 v1(83,18.19)
SYS_SWCLK: length 5
  TOP w0.28: v1(74.96,24.33) 74.95,24.32 U1.37
  BOTTOM w0.28: J1.1 73.16,24.38 73.39,24.6 74.68,24.6 v1(74.96,24.33)
SYS_SWDIO: length 3.2
  TOP w0.28: U1.34 v1(75.02,20.85)
  BOTTOM w0.28: J1.2 74.41,21.46 v1(75.02,20.85)
TX_EN: length 14.1
  TOP w0.2: v1(71.48,16.46) 71.95,15.99 U1.18 ; v1(69.73,6.04) 68.91,6.04 U5.6
  BOTTOM w0.2: v1(69.73,6.04) 70.15,6.04 70.75,6.65 70.75,8.39 71.91,9.55 71.91,16.03 v1(71.48,16.46)
TX_PWR_EN: length 6.3
  TOP w0.2: U5.15 62.31,6.05 61.9,6.47 Q1.1
  TOP w0.36: R8.2 60.89,8.01 60.89,7.39 61.22,7.06 Q1.1
USART1_RX: length 7.9
  TOP w0.2: v1(82.95,22.03) 80.93,22.03 78.25,19.35 U1.31
USART1_TX: length 7.6
  TOP w0.2: U1.30 78.76,18.85 80.64,20.73 v1(83,20.73)
USART2_RX: length 17.8
  TOP w0.2: U1.13 69.45,12.88 71.42,10.91 72.57,10.91 73.6,9.88 80.14,9.88 82.1,11.84 v1(83,11.84)
USART2_TX: length 21.5
  TOP w0.2: U1.12 67.6,16.35 67.27,16.02 67.27,13.84 70.71,10.4 71.91,10.4 73.09,9.22 80.65,9.22 82,10.57 v1(83,10.57)
UV_SHDN: length 19.1
  BOTTOM w0.25: U11.1 32.49,9.88 33.07,10.46 33.07,11.06 33.7,11.69 37.96,11.69 TP12.1 39.65,10 39.65,5.44 39.98,5.11 R42.2 40.79,6.11 U13.C2
  BOTTOM w0.4: R42.2 40.79,4.52 40.81,4.5 R46.1
VCAP: length 11.5
  TOP w0.25: v1(12.76,9.28) 10.28,9.28 9.65,8.65 R11.2
  VCC w0.127: v1(13.56,9.28) 13.17,9.28 13.17,9.28 v1(12.76,9.28) ; v1(14.65,10.95) 14.39,10.95 v1(14.06,10.62)
  BOTTOM w0.4: R36.2 v1(21.05,8.15)
  vias: v1(20.79,15.53) v1(21.24,16.41) v1(21.41,15.56) v1(21.78,16.07) v1(28.69,16.56) v1(29,15.75) v1(29.3,16.28) v1(29.65,15.53)
N478267: length 10.7
  TOP w0.3: v1(11.81,23.5) 11.81,24.56 12.48,25.23 15.63,25.23 v1(15.95,24.91)
  BOTTOM w0.25: U8.4 v1(11.81,23.5)
  BOTTOM w1: L5.1 21.88,26.2 21.88,26.2 TP8.1
N478365: length 7.4
  BOTTOM w0.25: R27.1 19.59,7.8 19.16,7.37 U12.6
  BOTTOM w0.4: R32.2 22.45,8.51 21.29,9.67 C35.2 20.6,9.67 20.58,9.69 R27.1
N479043: length 4.5
  BOTTOM w0.25: U12.7 19.41,6.92 20.26,6.07 R36.1
  BOTTOM w0.4: R37.2 21.96,6.17 21.86,6.07 R36.1
N485107: length 10.9
  TOP w0.3: v1(36.1,24.89) 35.78,25.21 32.53,25.21 31.9,24.57 v1(31.9,23.5)
  BOTTOM w0.25: U7.4 v1(31.9,23.5)
  BOTTOM w1: TP9.1 L4.1
N490401: length 11
  BOTTOM w0.2: R24.1 29.42,13.14 29.03,12.75 25.79,12.75 25.26,13.27 25.26,15.61 25.72,16.07 U9.5
  BOTTOM w0.4: R24.1 30.01,13.64 30.03,13.62 R23.2
N490405: length 8.8
  BOTTOM w0.2: R25.1 21.02,13.15 21.03,13.14 21.03,12.96 21.12,12.87 23.95,12.87 24.39,13.3 24.39,15.08 24.05,15.42 U9.3
  BOTTOM w0.4: R26.2 20.41,13.62 20.43,13.64 R25.1
N490413: length 2.8
  BOTTOM w0.25: R30.2 41.99,7.81 U13.A1
  BOTTOM w0.4: R30.2 C38.2
N490465: length 29.3
  TOP w0.2: v1(44.59,5.99) 43.73,5.12 33.55,5.12 32.58,6.09 32.58,10.21 31.54,11.26 24.46,11.26 23.22,12.5 v1(23.22,13.7)
  BOTTOM w0.4: v1(44.59,5.99) R41.2
N490853: length 2.9
  BOTTOM w0.25: U13.C1 41.93,6.27 41.93,6.26 41.99,6.2 R42.1
  BOTTOM w0.4: R42.1 R41.1
N490915: length 23.7
  TOP w0.2: v1(26.27,15.08) 25.54,15.08 25.15,14.69 25.15,12.85 25.66,12.34 32.46,12.34 33.52,11.28 33.52,6.66 34.1,6.08 v1(38.55,6.08)
  BOTTOM w0.25: R39.2 v1(38.55,6.08)
  BOTTOM w0.4: v1(26.27,15.08) 26.99,15.08
N490953: length 6.7
  BOTTOM w0.2: U11.2 30.29,8.93 29.9,8.55 29.9,4.5 29.59,4.19 28.76,4.19
N491089: length 3
  BOTTOM w0.25: U14.A1 35.54,8.1 35.64,8.2 R31.2
  BOTTOM w0.4: R31.2 C39.2
N491611: length 2.4
  TOP w0.5: C8.1 50.28,16.66 50.65,16.29 L3.2
N491653: length 2.9
  BOTTOM w0.25: R40.1 35.84,5.94 35.84,5.95 35.84,6.19 U14.C1
  BOTTOM w0.4: R40.1 R39.1
N492453: length 11.3
  TOP w0.2: 53.05,16.37 55.08,16.37 55.47,16.76 55.47,18.21 55.03,18.65 U2.9 ; 53.05,16.37 51.86,16.37 51.38,16.85 51.38,17.65 ; 53.05,16.37 U2.5 ; U2.4 51.38,17.65 ; 51.38,17.65 51.38,17.95 51.58,18.15 U2.3
N504730: length 8.2
  TOP w0.22: U1.3 67.21,20.85 66.57,21.49 66.57,23.38 65.65,24.3 Y1.1
  TOP w0.5: C3.1 Y1.1
N504882: length 6.3
  TOP w0.22: Y1.2 65.64,21.7 66.99,20.35 U1.4
  TOP w0.5: C5.1 Y1.2
N512213: length 3.8
  TOP w0.22: Y2.3 66.52,19.26 67.11,19.85 U1.5
N512221: length 3.6
  TOP w0.4: Y2.1 61.81,17.26 61.8,17.26 61.45,17.26 61.09,16.9 R4.1 R3.2
N512229: length 5.2
  TOP w0.4: L2.2 59.58,21.5 60.5,20.58 C6.1 61.34,19.7 61.78,19.26 Y2.4
N517140: length 4.8
  TOP w0.25: U1.9 v1(69.41,17.85)
  BOTTOM w0.28: L6.2 71.21,19.14 70.33,18.27 C26.2 69.69,17.57 v1(69.41,17.85)
N518111: length 5
  TOP w0.25: U1.7 v1(69.61,18.85)
  BOTTOM w0.28: v1(69.61,18.85) 70.03,19.27 C21.1 70.66,19.85 70.99,20.18 70.99,20.52 71.18,20.71 R14.1
N527048: length 26.1
  TOP w0.36: 60.28,3.76 58.69,3.76 58.33,4.12 58.33,5.51 58.01,5.84 v1(56.9,5.84) 55.76,5.84 53.17,8.42 46.66,8.42 46.02,7.79 46.02,5.05 46.67,4.4 LD1.1
  BOTTOM w0.36: R34.1 R38.1 57.79,5.6 57.56,5.84 v1(56.9,5.84) R43.1
N527184: length 6.5
  BOTTOM w0.36: 52.46,7.68 51.52,7.68 50.97,8.24 48.34,8.24 47.76,7.65 47.76,6.54 LD1.2
N527198: length 15.3
  TOP w0.25: R9.2 62.48,8.24 v1(62.18,7.94)
  BOTTOM w0.25: R38.2 61.03,5.6 62.18,6.75 v1(62.18,7.94)
  BOTTOM w0.36: Q3.1 53.65,3.58 54.58,2.65 58.08,2.65 58.41,2.98 R44.1 58.41,4.47 58.68,4.73 59.36,4.73 59.62,4.99 59.62,5.58 R38.2
N527202: length 2.5
  BOTTOM w0.36: Q3.3 55.14,3.95 55.44,3.65 55.79,3.65 55.84,3.7 R43.2
N527222: length 6.1
  BOTTOM w0.36: R33.1 R34.2 58.41,8.21 58.41,8.81 57.96,9.26 56.18,9.26 55.55,8.62 Q2.1
N527434: length 5
  BOTTOM w0.36: Q3.2 53.57,5.49 54.79,6.71 55.17,6.71
  BOTTOM w0.4: R35.1 56.15,6.81 56.05,6.71 55.17,6.71
N541574: length 2.7
  TOP w0.2: D3.2 63.91,4.18 63.75,4.34 62.84,4.34 62.69,4.49 62.69,5.13
N546758: length 10.4
  TOP w0.25: 52.45,12.84 52.26,13.03 PD1.1 ; 52.45,12.84 52.43,12.82 U4.4 ; 52.45,12.84 56.33,12.84 56.73,12.44 R7.2 C12.2
N546765: length 6.5
  TOP w0.3: U3.2 60.18,11.38 59.33,11.38 59.08,11.13 59.08,10.89 58.88,10.69 C12.1 ; R7.1 56.73,10.13 56.38,9.79 U4.1
  TOP w0.36: R7.1 C12.1
N549679: length 2.2
  TOP w0.28: U3.4 63.37,10.42 v1(63.62,10.67)
  BOTTOM w0.28: U10.2 63.78,10.82 v1(63.62,10.67)
N554827: length 1.5
  TOP w0.4: R6.1 D2.2
N555295: length 1.4
  TOP w0.36: D4.2 R11.1
N563900: length 1.9
  TOP w0.25: R10.1 64.39,5.13 64.98,4.55 U5.18
N602776: length 5.2
  TOP w0.25: U1.44 71.45,25.51 71.84,25.9 R1.1
  TOP w0.36: R1.1 72.33,26.79 72.34,26.8 R2.1
N742936: length 1.5
  TOP w0.4: D1.2 53.65,15.3 53.63,15.29 R5.1
N756514: length 7.5
  TOP w0.2: TP3.1 81.89,22.89 80.73,22.89 78.19,20.35 U1.33

## Copper pours and planes (outline as drawn; the poured copper is in the pictures)
GND on TOP (solid shape): 65.36,15.12 64,15.12 64,17.76 65.36,17.76
GND on TOP (solid shape): 67.4,25.43 62.42,25.43 62.42,27.53 67.4,27.53
GND on TOP (solid shape): 67.06,7.3 68.2,7.3 68.2,4.3 66.2,4.3 66.2,7.3 66.31,7.3 66.31,7.97 64.99,7.97 64.99,8.48 67.06,8.48
GND on TOP (solid shape): 49.33,19.88 49.33,18.49 49.38,18.44 49.38,17.38 47.56,17.38 47.56,19.88 47.75,19.88 47.75,19.88 49.33,19.88
GND on TOP (solid shape): 59.6,15.18 59.54,15.04 59.4,14.98 56.5,14.98 56.36,15.04 56.3,15.18 56.3,16.75 58.59,16.75 58.73,16.81 58.79,16.95 58.79,17.3 59.6,17.3
GND on TOP (solid shape): 61.6,23.73 61.69,23.52 61.9,23.43 62.54,23.43 62.75,23.34 62.84,23.13 62.84,22.89 62.75,22.68 62.54,22.59 61.9,22.59 61.69,22.51 61.6,22.3 61.6,21.14 60.85,21.14 60.85,24.86 61.6,24.86
GND on TOP (solid shape): 73.31,6.46 73.33,6.37 73.38,6.29 73.41,6.26 73.49,6.21 73.58,6.19 73.76,6.19 73.85,6.21 73.93,6.26 74.04,6.37 74.09,6.45 74.11,6.54 74.11,7.3 74.39,7.3 74.39,6.51 74.41,6.41 74.46,6.34 74.54,6.26 74.61,6.21 74.71,6.19 75.8,6.19 75.8,5.4 74.2,5.4 74.2,5.65 74.18,5.74 74.13,5.82 74.11,5.84 74.03,5.89 73.94,5.91 72.92,5.91 72.85,5.94 72.82,6.01 72.82,7.42 73.31,7.42
GND on BOTTOM (solid shape): 8.28,12.74 2.24,12.74 2.24,14.75 8.28,14.75
GND on BOTTOM (solid shape): 17.5,6.8 15.15,6.8 15.15,7.5 17.5,7.5
GND on BOTTOM (solid shape): 17.77,10.58 16.59,10.58 16.59,12.23 17.77,12.23
GND on BOTTOM (solid shape): 24.62,15.9 22.75,15.9 22.75,16.81 24.62,16.81
GND on BOTTOM (solid shape): 32.01,6.84 30.56,6.84 30.56,8.28 32.01,8.28
GND on BOTTOM (solid shape): 87.9,5.15 85.4,5.15 85.4,9.67 87.9,9.67
GND on BOTTOM (solid shape): 31.76,2.1 30.56,2.1 30.56,4.49 31.76,4.49
GND on BOTTOM (solid shape): 23.95,5.77 24.39,5.34 27.31,5.34 27.31,2.1 24,2.1 24,5.08 23.35,5.73 23.35,8.18 23.95,8.18
GND on BOTTOM (solid shape): 30.3,18.52 30.3,18.11 30.24,17.97 30.1,17.91 29.65,17.91 29.51,17.97 29.45,18.11 29.45,20.4 30.3,20.4
GND on BOTTOM (solid shape): 13.8,25.3 12.6,25.3 12.6,26.5 12.54,26.64 12.4,26.7 10.5,26.7 10.36,26.64 10.3,26.5 10.3,24.95 10.36,24.81 10.5,24.75 11.1,24.75 11.1,23.4 9.45,23.4 9.45,27.9 13.8,27.9
GND on BOTTOM (solid shape): 33.8,27.9 33.94,27.84 34,27.7 34,25.3 32.75,25.3 32.75,26.65 32.69,26.79 32.55,26.85 30.5,26.85 30.36,26.79 30.3,26.65 30.3,24.95 30.36,24.81 30.5,24.75 31.1,24.75 31.1,23.4 29.45,23.4 29.45,27.7 29.51,27.84 29.65,27.9
P1V8 on TOP (solid shape): 69.42,8.03 68.09,8.03 68.09,7.62 67.81,7.62 67.81,8.48 69.42,8.48
P1V8 on TOP (solid shape): 75.1,15.37 77.15,15.37 77.15,14.06 74.8,14.06 74.8,15.85 75.1,15.85
P1V8 on TOP (solid shape): 69.6,22.35 69.3,22.35 68.95,22 68.95,21.7 67.45,21.7 67.45,24.22 69.6,24.22
P1V8 on TOP (solid shape): 78.8,23.11 78.13,23.11 78.13,21.7 75.45,21.7 75.45,22 76.51,22 76.51,24.12 78.8,24.12
P1V8 on TOP (solid shape): 60.62,25.58 60.18,25.58 60.11,25.55 60.08,25.48 60.08,23.38 57.55,23.38 57.46,23.36 57.38,23.31 57.27,23.2 57.22,23.12 57.2,23.03 57.2,20.95 58.1,20.05 58.1,19.04 58.3,18.84 58.46,18.74 58.64,18.7 59.6,18.7 59.6,17.9 58.6,17.9 58.42,17.94 58.26,18.04 57.75,18.55 56.3,18.55 56.3,20.05 56.26,20.24 56.16,20.39 56.14,20.41 55.99,20.51 55.8,20.55 54.89,20.55 54.71,20.51 54.55,20.41 53.67,19.53 53.67,19.05 53.42,19.05 53.42,19.84 53.46,20.02 53.57,20.18 54.2,20.81 54.2,26.8 57.2,26.8 57.71,27.31 57.79,27.36 57.88,27.38 60.62,27.38
P1V8 on BOTTOM (solid shape): 77.95,21.81 76.51,21.81 76.51,24.12 77.95,24.12
P1V8 on BOTTOM (solid shape): 77.01,15.52 77.22,15.43 77.31,15.22 77.31,12 75.49,12 75.49,13.75 75.43,14.03 75.28,14.26 75.26,14.28 75.03,14.43 74.75,14.49 74.25,14.49 74.25,15.52
P1V8 on VCC: 85.2,28 85.04,27.55 84.99,27.08 85.6,25.6 87.08,24.99 87.55,25.04 88,25.2 88,11.3 80.6,11.3 80.49,11.28 80.39,11.21 79.39,10.21 79.32,10.11 79.3,10 79.3,6.2 79.32,6.09 79.39,5.99 80.1,5.28 80.1,4.52 79.88,4.3 78.52,4.3 78.01,4.81 77.91,4.88 77.8,4.9 71.8,4.9 71.69,4.88 71.59,4.81 70.08,3.3 68.12,3.3 67.7,3.72 67.7,8.68 68.53,9.5 68.53,12.21 65.23,15.51 61.87,15.51 60.9,16.48 56.64,16.48 54.84,18.28 54.84,21.18 53.82,22.2 53.82,28 55.77,28
P3V3 on BOTTOM (solid shape): 8.28,20.36 2.24,20.36 2.24,22.75 8.28,22.75
P3V3 on BOTTOM (solid shape): 8.28,7.23 2.24,7.23 2.24,9.67 8.28,9.67
P3V3 on BOTTOM (solid shape): 84.1,6.25 81.7,6.25 80.32,6.26 80.32,8.02 81.7,8.02 81.7,9.67 84.1,9.67
P3V3 on BOTTOM (solid shape): 20.14,5.22 20.29,5.11 20.48,5.07 22.2,5.07 22.2,3.23 22.2,2.65 22.15,2.51 22,2.45 18.5,2.45 18.36,2.51 18.3,2.65 18.3,5.51 18.27,5.7 18.16,5.85 18.09,5.92 17.99,6.08 17.95,6.26 17.95,6.6 18.75,6.6
P3V3 on VCC: 4.99,27.52 4.8,28 52.5,28 52.5,21.54 53.31,20.73 53.31,17.31 54.84,15.78 59.52,15.78 59.52,15.68 60.55,14.65 64.65,14.65 65.63,13.67 65.63,13.64 67.76,11.51 67.76,9.58 67.19,9.01 67.12,8.91 67.1,8.8 67.1,3.6 67.12,3.49 67.19,3.39 67.79,2.79 67.89,2.72 68,2.7 70.2,2.7 70.31,2.72 70.41,2.79 71.92,4.3 77.68,4.3 78.19,3.79 78.29,3.72 78.4,3.7 80,3.7 80.11,3.72 80.21,3.79 80.61,4.19 80.68,4.29 80.7,4.4 80.7,5.4 80.68,5.51 80.61,5.61 79.9,6.32 79.9,9.88 80.72,10.7 88,10.7 88,4.8 87.54,4.97 87.06,5.02 85.59,4.41 84.98,2.94 85.03,2.46 85.2,2 4.8,2 4.48,4.48 2,4.8 2,25.2 2.48,25.01 3,24.94 4.46,25.54 5.06,27 ; 1 cut-out
BOOST_EN on BOTTOM (solid shape): 17.55,9.44 18.75,8.24 18.75,7.7 17.95,7.7 17.95,8.41 16.99,9.37 16.75,9.37 16.75,9.97 17.55,9.97
LDO22 on BOTTOM (solid shape): 27.32,17.48 23.32,17.48 23.32,18.6 27.32,18.6
LDO22 on BOTTOM (solid shape): 27.78,13.39 25.86,13.39 25.86,14.3 27.78,14.3
LDO22 on VCC: 24.72,20.1 34.48,20.1 36.7,17.88 36.7,13.4 36.72,13.29 36.79,13.19 37.39,12.59 37.49,12.52 37.6,12.5 40.48,12.5 43.5,9.48 43.5,3.7 36.52,3.7 33.01,7.21 32.91,7.28 32.8,7.3 30,7.3 29.89,7.28 29.79,7.21 29.39,6.81 29.32,6.71 29.3,6.6 29.3,5.92 29.08,5.7 27.32,5.7 26.3,6.72 26.3,12 26.28,12.11 26.21,12.21 25.42,13.01 26.89,14.48 27.69,14.48 27.79,14.39 27.89,14.32 28,14.3 30,14.3 30.11,14.32 30.21,14.39 30.61,14.79 30.68,14.89 30.7,15 30.7,16.4 30.68,16.51 30.61,16.61 29.61,17.61 29.51,17.68 29.4,17.7 26.8,17.7 26.69,17.68 26.59,17.61 26.28,17.3 23.5,17.3 23.5,18.88
LDO22-1 on BOTTOM (solid shape): 11.99,22.67 12.06,22.62 13.3,22.62 13.3,22.38 12.54,22.38 12.35,22.34 12.19,22.23 12.12,22.16 11.96,22.06 11.78,22.02 11.68,22.02 11.59,22 11.51,21.95 11.1,21.54 11.1,21.2 9.7,21.2 9.7,22.4 10.93,22.4 11.06,22.53 11.22,22.64 11.4,22.67
LDO22-1 on VCC: 10.7,22.7 12.68,22.7 12.9,22.48 12.9,19.4 12.92,19.29 12.99,19.19 13.59,18.59 13.69,18.52 13.8,18.5 22.9,18.5 22.9,17.3 12.52,17.3 10.7,19.12
LDO22-2 on BOTTOM (solid shape): 33.5,22.38 31.76,22.38 31.57,22.34 31.42,22.23 31.1,21.92 31.1,21.2 29.29,21.2 29.1,21.16 28.95,21.06 28.66,20.77 28.55,20.61 28.52,20.43 28.52,17.64 27.92,17.64 27.92,20.67 27.95,20.85 28.06,21.01 29.31,22.26 29.47,22.36 29.65,22.4 31.1,22.4 31.18,22.48 31.34,22.59 31.52,22.62 33.5,22.62
VCAP on BOTTOM (solid shape): 21.95,16.73 22.09,16.68 22.15,16.54 22.15,15.98 22.12,15.8 22.01,15.64 21.58,15.21 21.58,14.54 20.46,14.54 20.46,15.63 20.31,15.78 20.31,16.73
VCAP on BOTTOM (solid shape): 30.22,15.94 30.12,15.83 30.01,15.67 29.98,15.49 29.98,14.54 28.8,14.54 28.8,15.28 28.76,15.47 28.66,15.62 28.49,15.79 28.38,15.95 28.35,16.13 28.35,16.7 28.4,16.84 28.55,16.9 30.22,16.9
VCAP on BOTTOM (solid shape): 15.95,10.57 14.87,10.57 14.68,10.54 14.53,10.43 14.27,10.18 14.17,10.02 14.13,9.84 14.13,9.12 14.17,8.94 14.27,8.78 14.67,8.39 14.83,8.28 15.01,8.25 15.95,8.25 15.95,7.7 11.05,7.7 11.05,8.85 11.11,8.99 11.25,9.05 11.68,9.05 11.86,9.08 12.02,9.19 12.21,9.38 12.32,9.54 12.35,9.72 12.35,11.32 15.95,11.32
VCAP on VCC: 26.92,17.1 29.28,17.1 30.1,16.28 30.1,15.12 29.88,14.9 28.12,14.9 27.96,15.06 25.04,15.06 22.88,12.9 18.4,12.9 18.29,12.88 18.19,12.81 17.79,12.41 17.72,12.31 17.7,12.2 17.7,9.4 17.79,9.19 18,9.1 21.48,9.1 21.7,8.88 21.7,7.72 21.48,7.5 13.12,7.5 12.1,8.52 12.1,11.08 13.61,12.59 13.68,12.69 13.7,12.8 13.7,15.68 14.72,16.7 26.4,16.7 26.51,16.72 26.61,16.79
VCAP1 on BOTTOM (solid shape): 16.96,22.02 17.07,21.87 17.1,21.68 17.1,21.14 17.14,20.96 17.24,20.8 17.6,20.44 17.76,20.34 17.94,20.3 19,20.3 19,17.23 19.15,16.88 19.5,16.73 19.71,16.73 19.71,15.94 18.2,15.94 17.85,15.79 17.7,15.44 17.7,14.1 17.56,13.74 17.2,13.59 15.44,13.59 15.09,13.74 14.94,14.1 14.94,15.31 15.03,15.77 15.29,16.16 16.77,17.64 17.03,18.03 17.12,18.49 17.12,19.25 17.08,19.43 16.98,19.59 16.81,19.76 16.66,19.86 16.47,19.9 15.4,19.9 15.4,20.5 16.2,20.5 16.38,20.68 16.49,20.84 16.52,21.02 16.52,21.91 16.49,22.09 16.38,22.25 16.25,22.38 15.4,22.38 15.4,22.62 16.36,22.62
VCAP2 on BOTTOM (solid shape): 36.8,22.62 36.98,22.59 37.14,22.48 37.31,22.31 37.41,22.16 37.45,21.97 37.45,21.06 37.49,20.88 37.59,20.72 37.87,20.44 38.03,20.34 38.21,20.3 39.4,20.3 39.4,18.9 39.01,18.9 35.68,15.57 35.68,13.59 32.99,13.59 32.99,15.73 32.93,15.87 32.79,15.93 30.82,15.93 30.82,16.82 32.37,16.82 32.56,16.85 32.71,16.96 33.12,17.37 33.28,17.47 33.46,17.51 36.3,17.51 36.48,17.54 36.64,17.65 37.06,18.07 37.16,18.22 37.2,18.41 37.2,19.16 37.16,19.34 37.06,19.5 36.8,19.76 36.64,19.86 36.46,19.9 35.6,19.9 35.6,20.5 36.3,20.5 36.48,20.54 36.64,20.64 36.72,20.73 36.83,20.89 36.87,21.07 36.87,22.19 36.86,22.24 36.83,22.28 36.77,22.34 36.73,22.37 36.68,22.38 35.6,22.38 35.6,22.62
N478267 on BOTTOM (solid shape): 20.5,25.68 17.95,25.68 17.77,25.64 17.61,25.53 16.34,24.27 16.24,24.11 16.2,23.93 16.2,23.88 15.4,23.88 15.4,24.5 15.36,24.68 15.26,24.84 14.8,25.3 14.8,26.85 20.5,26.85
N478271 on BOTTOM (solid shape): 18.12,23.62 18.3,23.59 18.46,23.48 19.48,22.47 19.64,22.36 19.82,22.32 20.5,22.32 20.5,21.27 18.3,21.27 18.3,21.35 18.26,21.53 18.16,21.69 16.61,23.23 16.46,23.34 16.27,23.38 15.4,23.38 15.4,23.62
N478287 on BOTTOM (solid shape): 15.95,6.06 15.12,6.06 14.93,6.03 14.78,5.92 13.39,4.54 13.29,4.38 13.25,4.2 13.25,3.35 11.05,3.35 11.05,4.4 12.12,4.4 12.3,4.44 12.46,4.54 14.38,6.46 14.54,6.56 14.72,6.6 15.95,6.6
N478345 on BOTTOM (solid shape): 13.3,21.88 12.83,21.88 12.1,21.15 12.08,21.11 12.07,21.06 12.07,21.01 12.06,20.97 12.03,20.93 11.71,20.6 11.68,20.56 11.67,20.51 11.67,19.54 11.71,19.36 11.81,19.2 11.92,19.09 12.08,18.99 12.26,18.95 14.86,18.95 15.04,18.99 15.2,19.09 15.4,19.29 15.4,19.3 16.2,19.3 16.2,19.3 16.2,18.55 11.76,18.55 11.57,18.59 11.42,18.69 11.04,19.07 10.94,19.22 10.9,19.41 10.9,20.4 10.98,20.4 11.71,21.13 11.74,21.17 11.75,21.21 11.75,21.32 11.76,21.37 11.78,21.41 12.5,22.12 13.3,22.12
N478369 on BOTTOM (solid shape): 11.82,25.88 11.92,25.72 11.96,25.54 11.96,24.83 12,24.65 12.1,24.49 12.47,24.12 13.3,24.12 13.3,23.88 12.45,23.88 12.26,23.91 12.11,24.02 11.69,24.43 11.69,25.01 11.66,25.19 11.55,25.35 11.5,25.4 10.9,25.4 10.9,26.2 11.5,26.2
N478385 on BOTTOM (solid shape): 16.03,21.49 16,21.31 15.89,21.15 15.81,21.07 15.66,20.97 15.47,20.93 15.07,20.93 14.88,20.89 14.72,20.79 14.64,20.71 14.54,20.55 14.5,20.36 14.5,19.6 13.9,19.6 13.9,20.47 13.94,20.66 14.04,20.81 14.27,21.05 14.43,21.15 14.62,21.19 15.15,21.19 15.19,21.2 15.23,21.22 15.36,21.36 15.39,21.4 15.4,21.44 15.4,22.12 16.03,22.12
N485107 on BOTTOM (solid shape): 40.7,25.68 37.98,25.68 37.8,25.64 37.64,25.53 36.54,24.44 36.44,24.28 36.4,24.09 36.4,23.88 35.6,23.88 35.6,24.5 35.56,24.68 35.46,24.84 35,25.3 35,26.85 40.7,26.85
N485115 on BOTTOM (solid shape): 38.16,23.62 38.34,23.59 38.5,23.48 39.66,22.32 40.7,22.32 40.7,21.27 38.5,21.27 38.5,22.32 37.59,23.23 37.43,23.34 37.25,23.38 35.6,23.38 35.6,23.62
N485373 on BOTTOM (solid shape): 33.5,21.88 32.98,21.88 31.5,20.4 31.5,19.22 31.52,19.13 31.57,19.05 31.66,18.96 31.74,18.91 31.83,18.89 35.09,18.89 35.18,18.91 35.26,18.96 35.6,19.3 36.4,19.3 36.4,18.65 36.37,18.58 36.3,18.55 31.56,18.55 31.38,18.59 31.22,18.69 31.04,18.87 30.94,19.03 30.9,19.21 30.9,20.4 30.98,20.4 32.7,22.12 33.5,22.12
N485445 on BOTTOM (solid shape): 32.07,25.63 32.17,25.47 32.21,25.29 32.21,25.08 32.25,24.89 32.35,24.74 32.37,24.72 32.45,24.67 32.54,24.65 33.5,24.65 33.5,23.88 32.67,23.88 32.58,23.89 32.5,23.95 32,24.45 31.9,24.6 31.86,24.79 31.86,24.83 31.84,24.92 31.79,25 31.39,25.4 30.9,25.4 30.9,26.2 31.5,26.2
N485483 on BOTTOM (solid shape): 36.09,21.5 36.05,21.31 35.95,21.16 35.84,21.04 35.68,20.94 35.49,20.9 35.2,20.9 35.02,20.87 34.86,20.76 34.84,20.74 34.74,20.59 34.7,20.4 34.7,19.6 34.1,19.6 34.1,20.42 34.11,20.46 34.14,20.5 34.66,21.03 34.82,21.13 35,21.17 35.43,21.17 35.47,21.18 35.51,21.21 35.56,21.26 35.59,21.3 35.6,21.34 35.6,22.12 36.09,22.12
N490465 on BOTTOM (solid shape): 23.75,13.39 22.75,13.39 22.75,14.95 23.75,14.95
N490915 on BOTTOM (solid shape): 27.6,14.6 26.6,14.6 26.6,15.6 27.6,15.6
N491611 on TOP (solid shape): 51.4,19.42 51.55,19.31 51.74,19.27 52.65,19.27 52.65,18.52 51.12,18.52 50.94,18.49 50.78,18.38 50.72,18.32 50.62,18.17 50.58,17.98 50.58,17.38 50.03,17.38 50.03,19.88 50.93,19.88
N492211 on TOP (solid shape): 50.9,22.32 53.03,20.18 53.14,20.02 53.17,19.84 53.17,19.05 52.92,19.05 52.92,19.54 52.05,20.41 51.9,20.51 51.71,20.55 47.9,20.55 47.9,26.8 50.9,26.8
GND on TOP (solid shape): 53.6,18.27 54.66,18.27 54.8,18.22 54.86,18.07 54.86,17.09 54.8,16.95 54.66,16.89 54.15,16.89 54.01,16.95 53.95,17.09 53.95,18.1 53,18.1 53,18.7 53.6,18.7
GND on TOP (solid shape): 55.53,20.04 55.67,19.98 55.73,19.84 55.73,19.23 55.67,19.08 55.53,19.02 53.95,19.02 53.95,19.27 54.74,19.27 54.88,19.33 54.94,19.48 54.94,19.84 55,19.98 55.14,20.04
GND on BOTTOM (solid shape): 10.3,18.34 10.24,18.2 10.1,18.14 9.7,18.14 9.56,18.2 9.5,18.34 9.5,20.61 10.3,20.61
GND on BOTTOM (solid shape): 11.15,12.68 11.29,12.63 11.35,12.48 11.35,9.59 9.95,9.59 9.95,12.48 10.01,12.63 10.15,12.68
GND on BOTTOM (solid shape): 16.5,2.3 16.44,2.16 16.3,2.1 14.96,2.1 14.82,2.16 14.76,2.3 14.76,5.07 16.5,5.07
GND on BOTTOM (solid shape): 43.6,13.1 41.69,13.1 41.48,13.19 41.39,13.4 41.39,16.81 41.48,17.02 41.69,17.11 43.6,17.11
GND on BOTTOM (solid shape): 43.64,20.3 43.86,20.21 43.94,20 43.94,19.05 43.86,18.84 43.64,18.75 40.4,18.75 40.4,20.3
GND on BOTTOM (solid shape): 46.32,12.1 46.53,12.01 46.62,11.8 46.62,10.6 46.53,10.39 46.32,10.3 43.8,10.3 43.8,12.1
GND on BOTTOM (solid shape): 23.07,20.55 23.25,20.51 23.41,20.41 23.69,20.13 23.79,19.97 23.83,19.79 23.83,19.76 23.77,19.61 23.63,19.56 21.55,19.56 21.41,19.5 21.35,19.36 21.35,18.9 20,18.9 20,20.35 20.06,20.49 20.2,20.55
GND on GND: 4.98,28 85.2,28 85.04,27.55 84.99,27.08 85.6,25.6 87.08,24.99 87.55,25.04 88,25.2 88,4.8 87.54,4.97 87.06,5.02 85.59,4.41 84.98,2.94 85.03,2.46 85.2,2 4.8,2 4.48,4.48 2,4.8 2,25.2 2.48,25.01 3,24.94 4.46,25.54 5.06,27 5.01,27.45 4.86,27.88
P1V8 on BOTTOM (solid shape): 68.37,24.19 68.55,24.15 68.71,24.05 69.09,23.67 69.19,23.51 69.23,23.33 69.23,22.24 69.19,22.06 69.09,21.9 68.97,21.78 68.87,21.62 68.83,21.44 68.83,21.16 66.08,21.16 66.08,23.19 66.37,23.9 67.08,24.19
P3V3 on TOP (solid shape): 48.3,16.45 48.49,16.41 48.64,16.31 48.65,16.3 48.81,16.19 48.99,16.16 49.5,16.16 49.5,14.88 48.75,14.88 48.64,14.77 48.49,14.67 48.3,14.63 46.6,14.63 46.46,14.69 46.4,14.83 46.4,16.25 46.46,16.39 46.6,16.45
P3V3 on BOTTOM (solid shape): 21.61,11.97 21.76,11.91 21.82,11.77 21.82,10.57 18.99,10.57 18.99,11.77 19.05,11.91 19.19,11.97
P3V3 on BOTTOM (solid shape): 46.27,17.09 46.55,17.03 46.78,16.88 46.96,16.7 47.19,16.55 47.47,16.49 48.3,16.49 48.51,16.4 48.6,16.19 48.6,14.86 48.51,14.65 48.3,14.56 47.47,14.56 47.19,14.5 46.96,14.35 45.92,13.31 45.69,13.16 45.41,13.1 44.6,13.1 44.6,17.09
LDO22-1 on BOTTOM (solid shape): 22.72,17.48 20.68,17.48 20.54,17.54 20.48,17.68 20.48,18.24 20.54,18.38 20.68,18.44 22.72,18.44

Small or netless copper shapes (teardrops, artwork), in the pictures only: 2 on TOP, 2 on BOTTOM

## Text on the board
Ref Des/Silkscreen Bottom: CH1 | LDO22 | G | EXCLUSIVE | CH2 | PHOTOVOLTAIC | ENERGY HARVESTER | PSUA2 | GLPP2024 | NO POLARITY PROTECTION | LOW-POWER-CONSUMPTION | WARNING
Ref Des/Silkscreen Top: PHOTOVOLTAIC | GLPP2024 | PSUA2 | ENERGY HARVESTER
XSECTION_CHART: *  SURFACE | L1 TOP CONDUCTOR | *  DIELECTRIC | L2 GND CONDUCTOR | L3 VCC CONDUCTOR | L4 BOTTOM CONDUCTOR | DESIGN CROSS SECTION CHART | ___________________________ | TOTAL THICKNESS 1.0212 MM | 1-4
DIMENSION: 4 LAYERS PCB STACK, 1.0mm THINKNESS, NO IMPEDANCE MATCH DEMAND. | ANY QUESTIONS PLEASE CONTACT ME: +8613522296239 | FIGURE | FINISHED_SIZE | 0.2 | 0.9 | 1.0 | 1.2 | 1.8 | 2.2 | DRILL CHART: TOP to BOTTOM | ALL UNITS ARE IN MILLIMETERS | PLATED | NON-PLATED | QTY | 318 | 2 | 4 | 8
